# Altium PCB PCB3.PcbDoc
Units mm, origin at the board's own origin, x right, y up, seen from the top; angles counter-clockwise.
Board outline 57.02 x 43.56 mm, 2 copper layers (Top Layer, Bottom Layer); 8 components, 7 nets, 28 pads, 0 vias.
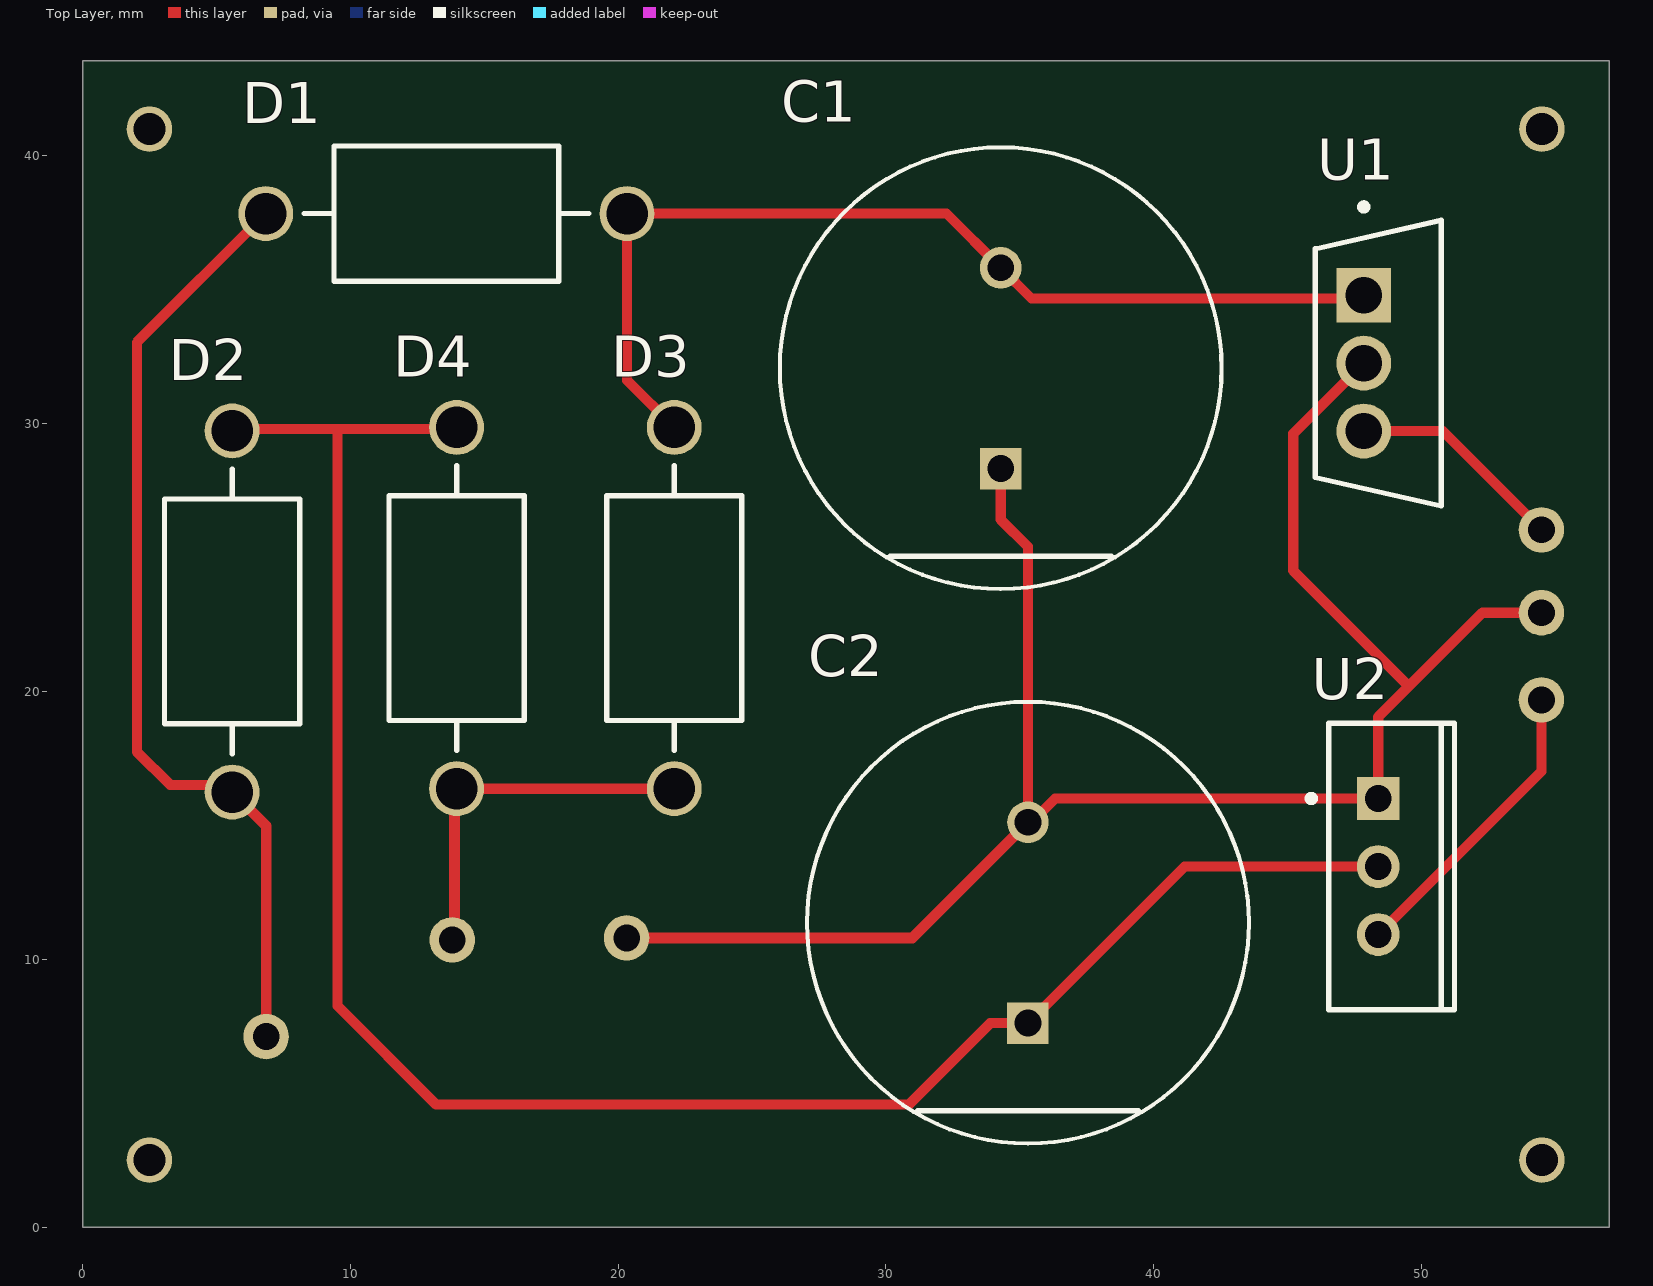
[diagram p0: Top Layer view]
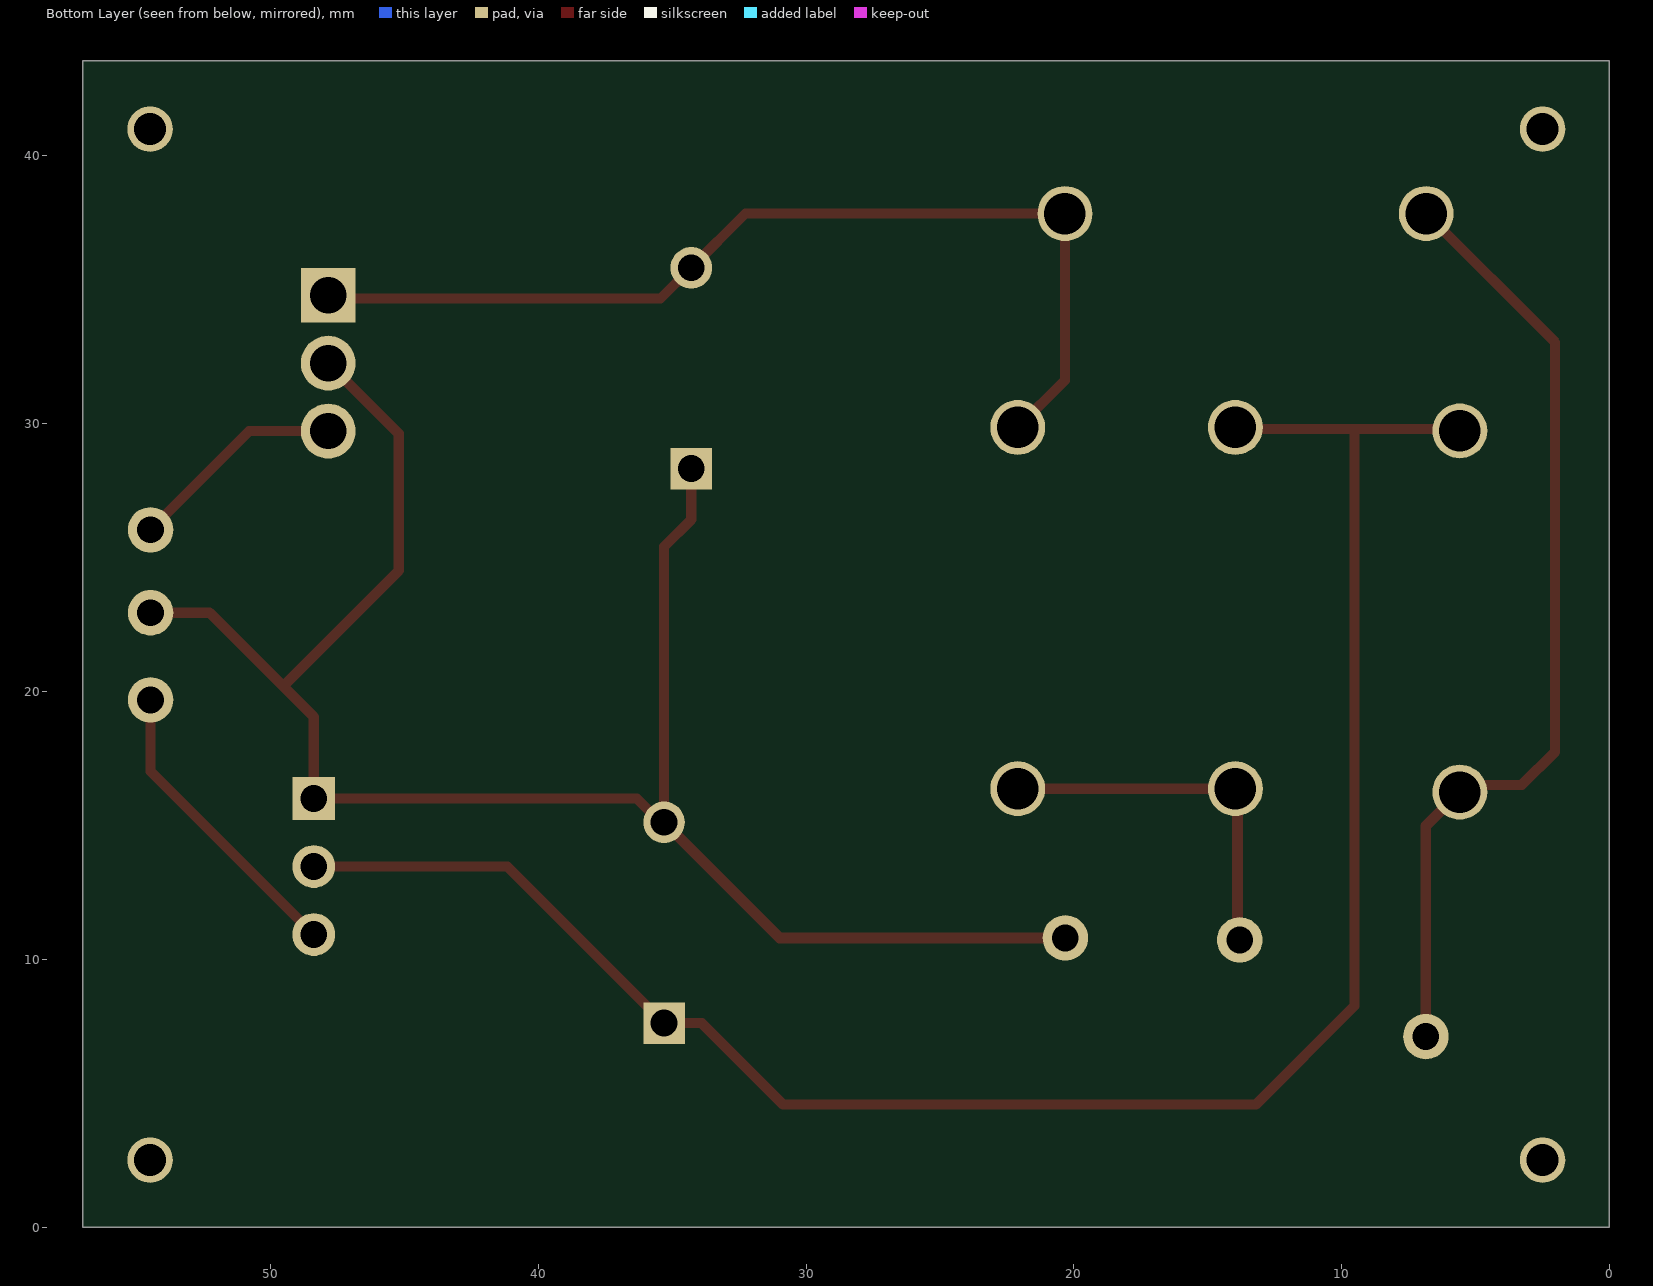
[diagram p1: Bottom Layer view, seen from below]

## Layer stack, top to bottom
Top Solder: solder mask 0.0102, Solder Resist, Dk 3.5
Top Layer: signal copper 0.0356
Dielectric 1: dielectric 0.32, FR-4, Dk 4.8
Bottom Layer: signal copper 0.0356
Bottom Solder: solder mask 0.0102, Solder Resist, Dk 3.5

## Board outline
0,0 57.023,0 57.023,43.561 0,43.561

## Design rules (kind name [scope] priority, off if disabled: settings)
Clearance [All] p1: gap=0.254 ignorepadtopadclearanceinfootprint=FALSE except(0: Arc-Hole Track-Hole SMDPad-Hole THPad-Hole Via-Hole Fill-Hole Poly-Hole Region-Hole Text-Hole)
PolygonConnect [All] p1: connectstyle=Relief reliefconductorwidth=0.254 reliefentries=4 polygonreliefangle="90 Angle" airgapwidth=0.254
RoutingVias [All] p1: holewidth=0.711 width=1.27 viastyle="Through Hole" minholewidth=0.711 minwidth=1.27 maxholewidth=0.711 maxwidth=1.27
SolderMaskExpansion [All] p1: expansion=0.102 istentingtop=FALSE
Width MaxMinWidth_1 [All] p1: maxlimit=0.4 minlimit=0.254 preferedwidth=0.37 minimp=50.000000 maximp=50.000000 favimp=50.000000
Width [All] p2: maxlimit=0.254 minlimit=0.254 preferedwidth=0.254
30 further rules are at their usual default settings.

## Components (designator, comment, footprint, x,y, rotation, side; value= is the part's Value field where it differs from the comment)
C1 "EEUEE2G470" FP-RAD-TH-D_16_0_5-L_25_2-MFG 34.29,32.071 r90 top
C2 "EEUEE2G470" FP-RAD-TH-D_16_0_5-L_25_2-MFG 35.306,11.363 r90 top
D1 "1N5408" ONSC-AXIAL_LEAD-2-267-05_V 13.589,37.846 r180 top
D2 "1N5408" ONSC-AXIAL_LEAD-2-267-05_V 5.588,22.987 r90 top
D3 "1N5408" ONSC-AXIAL_LEAD-2-267-05_V 22.098,23.114 r270 top
D4 "1N5408" ONSC-AXIAL_LEAD-2-267-05_V 13.97,23.114 r90 top
U1 "LM7812CT" FP-TO220B03-MFG 48.387,32.258 r0 top
U2 "LM7912CT" NDE0003A 48.387,13.462 r270 top

## Footprints (in the part's own frame and the unit in brackets; to place one, negate y for a bottom-side part, rotate by r counter-clockwise, add the part's x,y. Pads: shape width x height; smd on the part's side, far side on the other; paste and mask are expansions set on the pad)
FP-RAD-TH-D_16_0_5-L_25_2-MFG [mm]
  rect 1.55x1.55 hole 1 paste-2539.97 mask+0: 1(-3.75,0)
  round 1.55 hole 1 paste-2539.97 mask+0: 2(3.75,0)
  silkscreen extent -8.25,-8.25 8.25,8.25, body extent -8.35,-8.35 8.35,8.35, height 0.25
FP-TO220B03-MFG [mm]
  rect 2.05x2.05 hole 1.35 paste-2539.97 mask+0: 1(-0.54,2.535)
  round 2.05 hole 1.35 paste-2539.97 mask+0: 2(-0.54,0) 3(-0.54,-2.535)
  silkscreen extent -2.35,-5.34 2.35,5.96, body extent -2.45,-5.44 2.45,5.44, height 0.25
NDE0003A [mm] "FM, 3-Leads, Body 10.7x4.7mm, Pitch 2.54mm"
  rect 1.6x1.6 hole 1: 1(-2.54,0)
  round 1.6 hole 1: 2(0,0) 3(2.54,0)
  silkscreen extent -5.35,-2.62 5.35,2.85, body extent -5.4,-1.9 5.4,2.9, height 19.4
ONSC-AXIAL_LEAD-2-267-05_V [mm] "AXIAL, 2-Leads, Diameter 5.05mm"
  round 2.05 hole 1.55: 1(-6.745,0) 2(6.745,0)
  silkscreen extent -5.32,-2.52 5.32,2.52

## Part data
C1 C2: library part CMP-05427-001116-1, "Aluminum Electrolytic Capacitors (Radial Lead Type) 47uF ±20% 400V", Capacitance=47uF, Case/Package=Radial, Dielectric Material=Aluminium, Leakage Current=1.138mA, Max Operating Temperature=105°C, Min Operating Temperature=-25°C, Package Quantity=100, Ripple Current=1.18A, Tolerance=20%, Voltage=400V, Construction=RADIAL, Diameter=16mm, Dissipation Factor=0.24%, Height=25mm, Height - Seated (Max)=0.984inch, Lead Diameter=0.8mm, Lead Free="Lead Free", Lead Pitch=7.5mm, Length=25mm, Life (Hours)=10000Hour, Mount="Through Hole", Number of Pins=2, Packaging=Bulk, Radiation Hardening=No, REACH SVHC="No SVHC", Ripple Current (AC)=1.18A, RoHS Compliant=Yes, Series=EE, Termination=Radial, Voltage Rating=400V, Voltage Rating (DC)=400V
D1 D2 D3 D4: library part CMP-0902-00037-1, "Standard Recovery Rectifier, 2-Pin Axial_Lead, Pb-Free, Bulk Box", Manufacturer="On Semiconductor", ComponentLink1Description="Manufacturer URL", ComponentLink1URL=http://www.onsemi.com/, ComponentLink2Description=Datasheet, ComponentLink2URL=http://www.onsemi.com/pub_link/Collateral/1N5400-D.PDF, ComponentLink3Description="Package Specification", ComponentLink3URL=http://www.onsemi.com/pub_link/Collateral/267-05.PDF, DatasheetVersion="Rev. 10", IFSM Max (A)=200, IO(rec) Max (A)=3, Mounting Technology="Through Hole", PackageDescription="2-Pin, Axial Lead, Diameter 5.05 mm", PackageReference=AXIAL_LEAD-2-267-05, PackageVersion="Rev. G, 06/2000", Packing="Bulk Box", PartNumber=1N5408, RoHS=TRUE, Type="Standard Recovery", VRRM Max (V)=1000
U1: library part CMP-07128-000015-1, "IC REG LINEAR 12V 1A TO220-3", Dropout Voltage=2V, Manufacturer="ON Semiconductor", Max Supply Voltage=35V, Nominal Supply Current=5.1mA, Output Current=1A, Output Voltage=12V, Package=TO220B03, Temperature="-40°C to +125°C", Temperature Range High=+125°C, Temperature Range Low=-40°C, Accuracy Percentage=4%, Automotive=No, Category=IC, ComponentLink2Description=Datasheet, ComponentLink2URL=https://www.mouser.in/datasheet/2/308/LM7812-1125088.pdf, Device Class L1="Integrated Circuits (ICs)", Device Class L2="Power Management ICs", Device Class L3="Voltage Regulators - Linear", Digikey Description="IC REG LINEAR 12V 1A TO220-3", Height=20.4mm, Ipc Land Pattern Name=TO-220, Lead Free=Yes, Manufacturer Part Number=LM7812CT, Number Of Outputs=1, Obsolete Part=true, Octopart=https://octopart.com/lm7812ct-on+semiconductor-14383031, Output Type=Fixed, RoHS=TRUE, Standoff Height=2.7mm
U2: library part CMP-0062-02472-3, "3-Terminal Negative Regulator, 3-pin TO-220", Manufacturer="Texas Instruments", PackageTopMarking=NSUZXYTTE#*LM7912CT, PowerWise=N, ComponentLink1Description="Datasheet URL", ComponentLink1URL=http://www.ti.com/general/docs/lit/getliterature.tsp?genericPartNumber=LM7912&fileType=pdf, CompType="LDO IC", PackageDescription="TO-220, Molded, 3 Lead, Straight", PackageReference=NDE0003A, PinCount=3, RoHS=N

## Free pads (board coordinates)
  round 1.7 hole 1: 29(6.858,7.112) 29(13.807,10.72) 29(20.32,10.795) 29(54.483,19.685) 29(54.483,22.939) 29(54.483,26.035)
  round 1.7 hole 1.2: 30(2.5,2.5) 30(2.5,41) 30(54.5,2.5) 30(54.5,41)

## Nets (pads, with @x,y where several pads share a name; then routed paths per layer and width w, separated by ;. In a path a pad name is that pad's centre, name@x,y a point inside that pad or via, vN(x,y) a via of type N, cw(c..) or ccw(c..) an arc to the next point about the centre after c; other vN are vias at no path point)
GND: C1.1 C2.2 pad.29@20.32,10.795 pad.29@54.483,22.939 U1.2 U2.1 | length 69.7
  Top Layer w0.381: pad.29@20.32,10.795 pad.29@20.447,10.668 ; C1.1 34.29,26.416 35.306,25.4 C2.2 35.432,15.113 36.321,16.002 U2.1 48.387,19.05 49.53,20.193 ; U1.2 45.212,29.623 45.212,24.511 49.53,20.193 ; pad.29@54.483,22.939 52.276,22.939 49.53,20.193
  Top Layer w0.4: pad.29@20.32,10.795 30.988,10.795 C2.2
NetC1_2: C1.2 D1.1 D3.1 U1.1 | length 37.6
  Top Layer w0.381: D3.1 20.334,31.623 D1.1 32.265,37.846 C1.2 35.44,34.671 47.725,34.671 U1.1
NetC2_1: C2.1 D2.2 D4.2 U2.2 | length 74
  Top Layer w0.381: D2.2 5.651,29.796 9.525,29.796 ; D4.2 13.906,29.796 9.525,29.796 ; U2.2 41.155,13.462 C2.1 33.902,7.613 30.861,4.572 13.208,4.572 9.525,8.255 9.525,29.796
Vin+: D1.2 D2.1 pad.29@6.858,7.112 | length 35.9
  Top Layer w0.381: D2.1 5.32,16.51 3.271,16.51 2.032,17.749 2.032,33.034 D1.2
  Top Layer w0.4: D2.1 6.858,14.972 pad.29@6.858,7.112
Vin-: D3.2 D4.1 pad.29@13.807,10.72 | length 13.9
  Top Layer w0.381: pad.29@13.779,10.731 13.807,10.72 pad.29@13.889,10.801 ; D4.1@13.889,16.288 D4.1 D3.2
  Top Layer w0.4: pad.29@13.889,10.801 D4.1@13.889,16.288
Vout+: pad.29@54.483,26.035 U1.3 | length 8.3
  Top Layer w0.381: U1.3 50.795,29.723 54.483,26.035 pad.29@54.359,25.911
Vout-: pad.29@54.483,19.685 U2.3 | length 11.3
  Top Layer w0.381: U2.3 54.483,17.018 pad.29@54.483,19.685